# Altium PCB PCB1.PcbDoc
Units mil, origin at the board's own origin, x right, y up, seen from the top; angles counter-clockwise.
Board outline 2885 x 3150 mil, 2 copper layers (Top Layer, Bottom Layer); 31 components, 43 nets, 141 pads, 0 vias.
Unrouted connection lines stored in the file: 1.
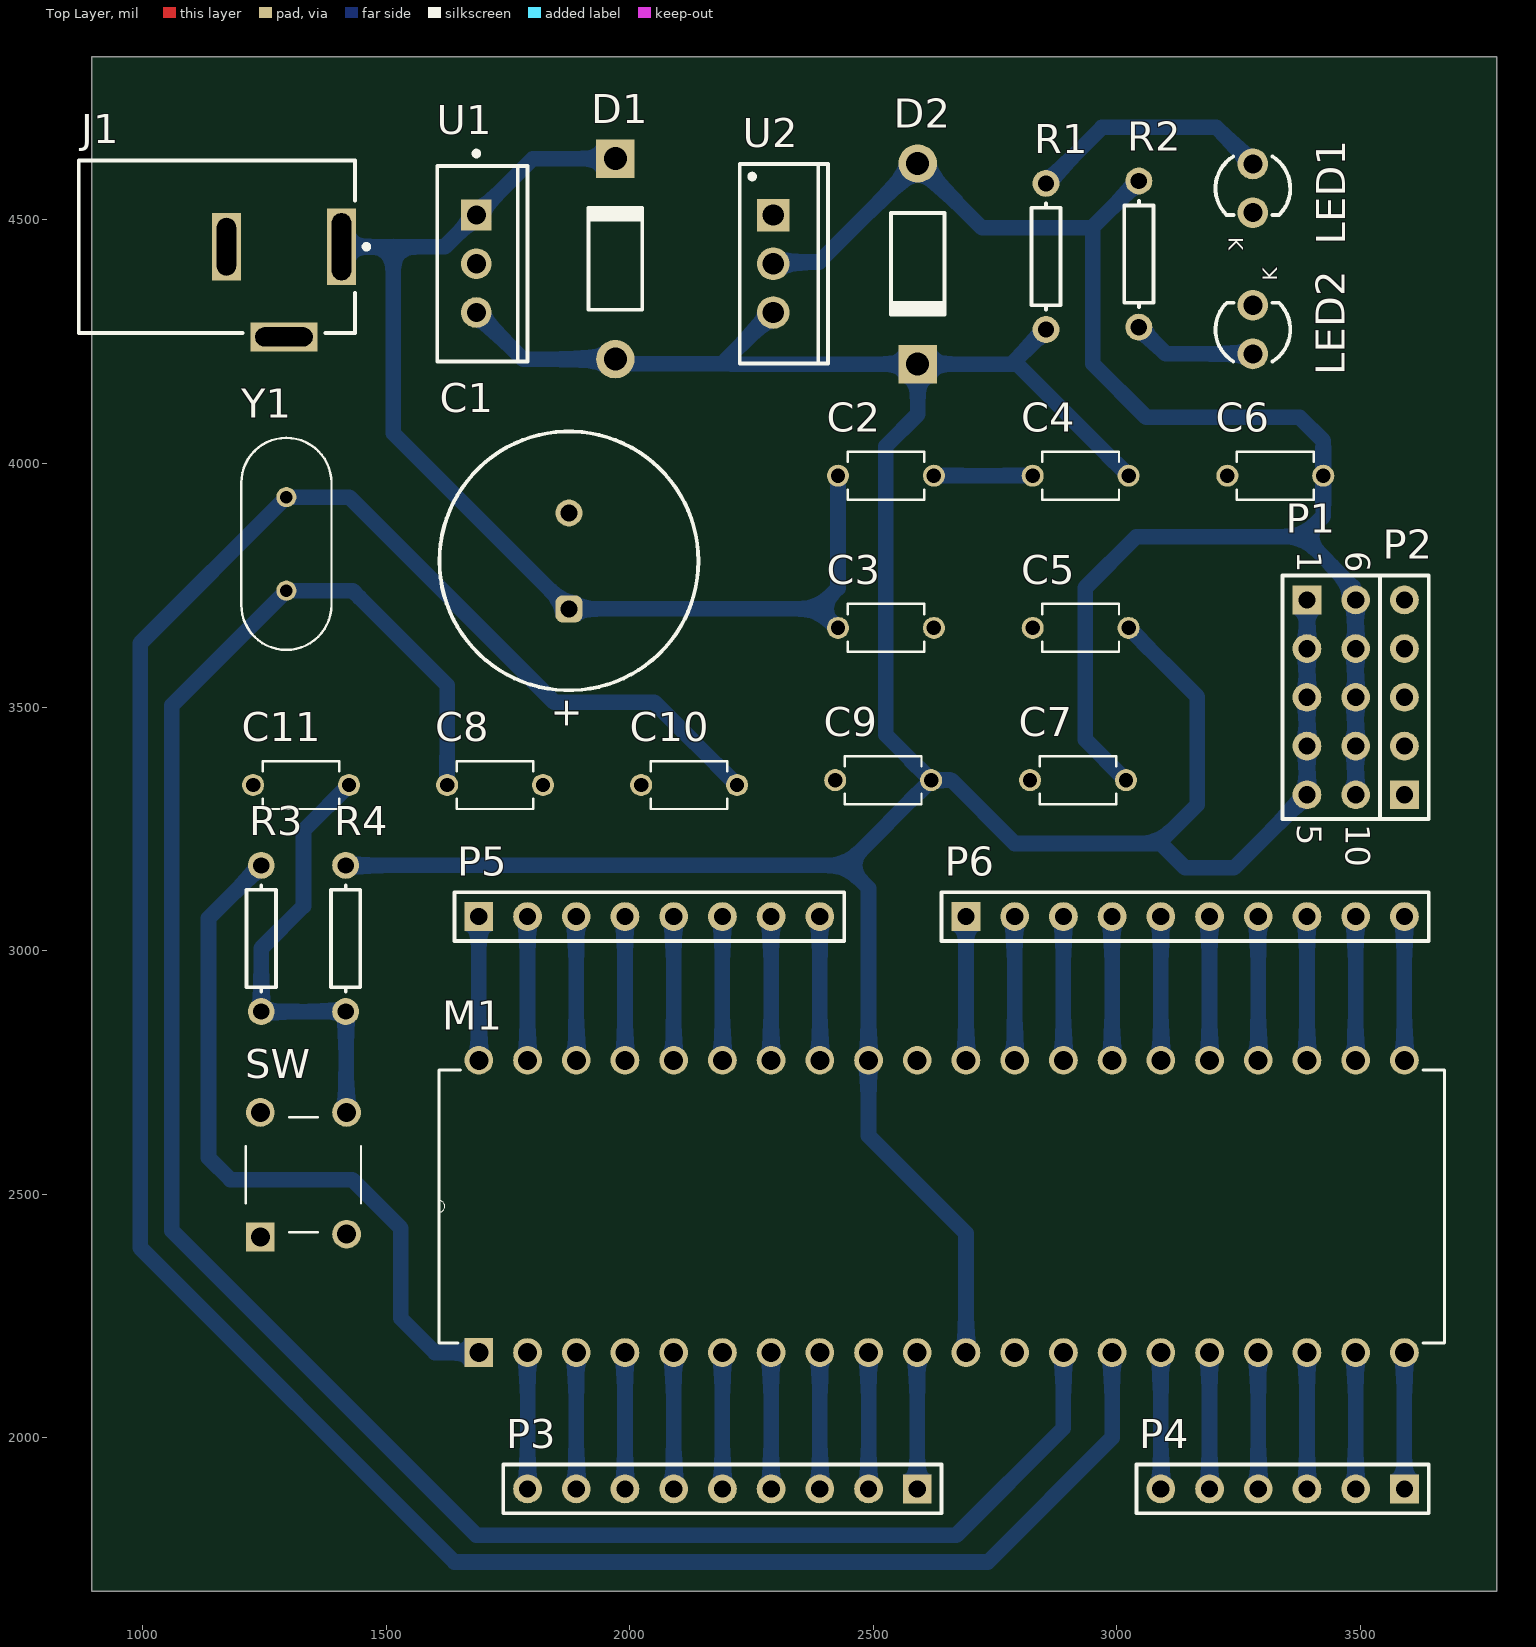
[diagram p0: Top Layer view]
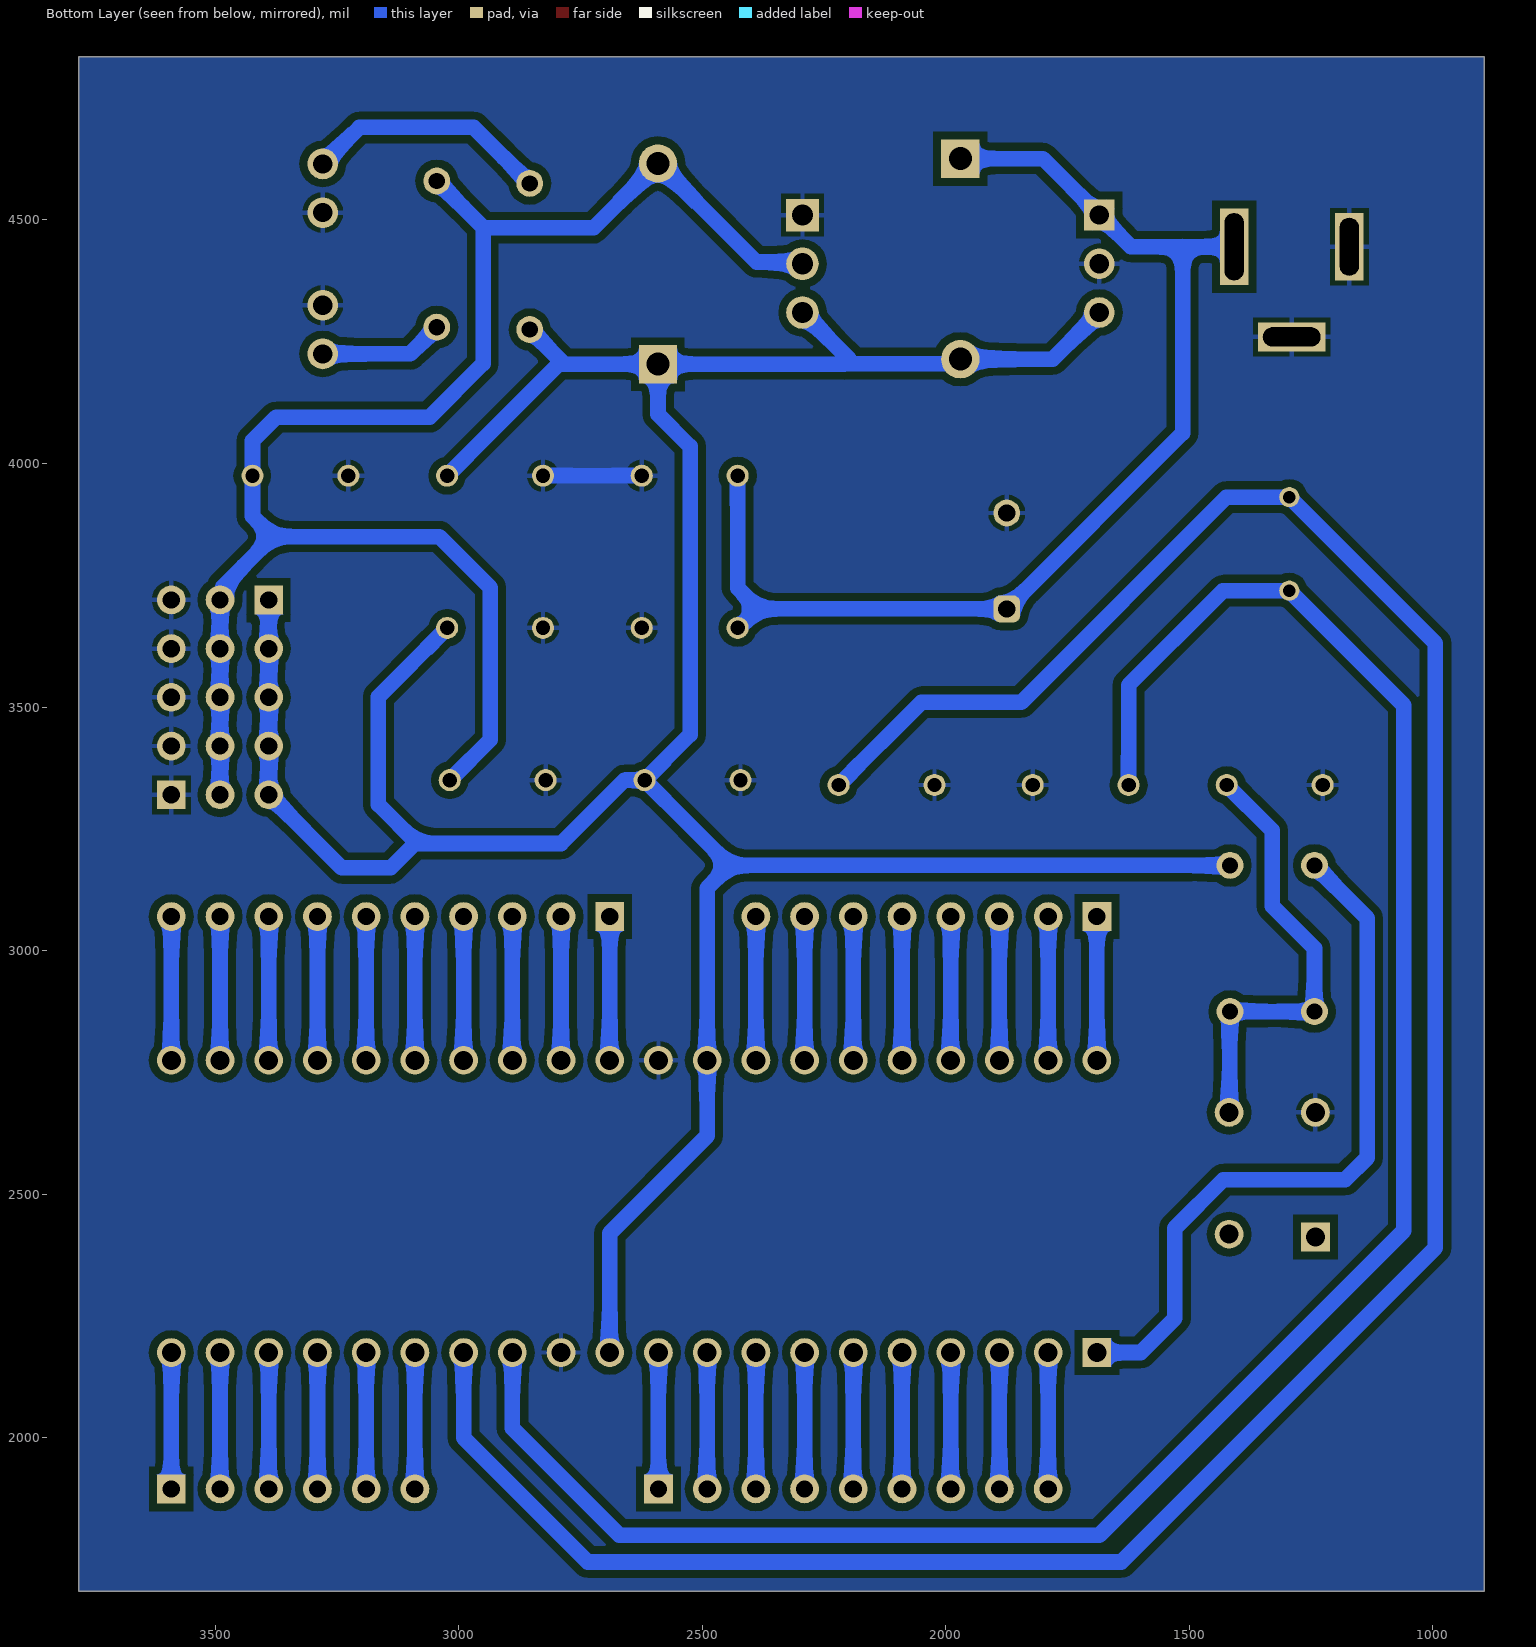
[diagram p1: Bottom Layer view, seen from below]
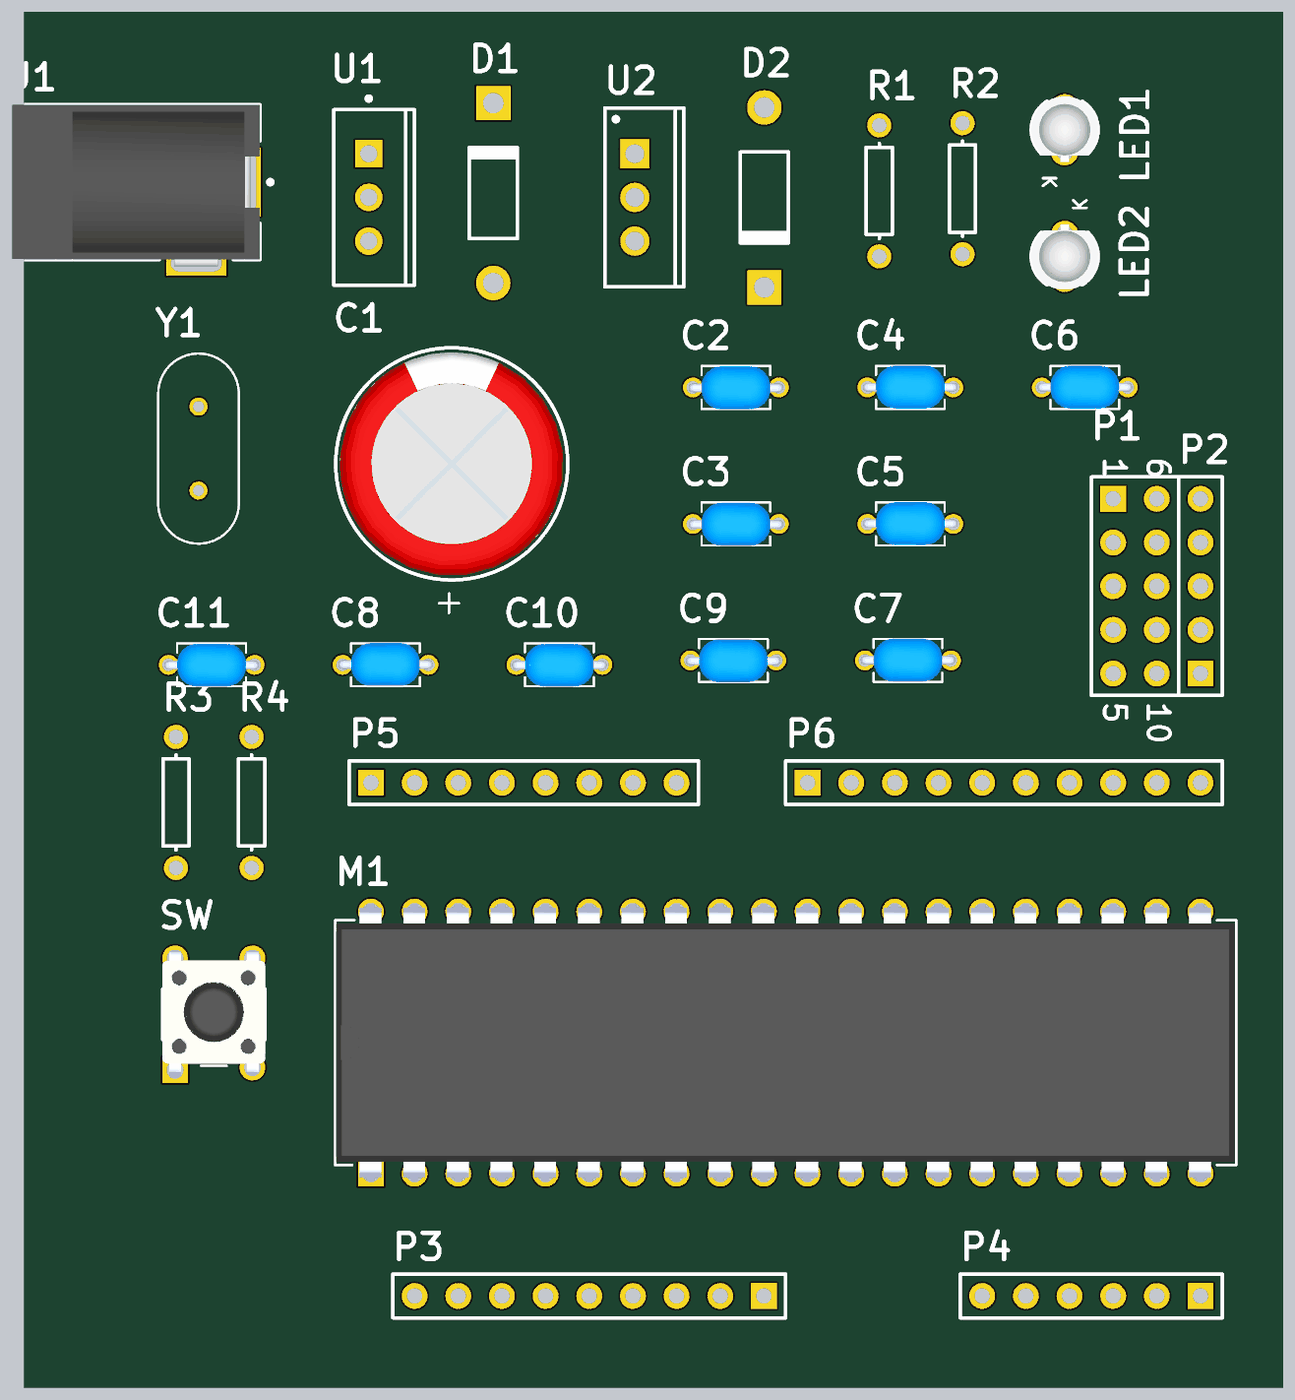
[diagram p2: 3D render of the assembled board from above, using the file's embedded part models]

## Layer stack, top to bottom
Top Solder: solder mask 0.4, Solder Resist, Dk 3.5
Top Layer: signal copper 1.4
Dielectric 1: dielectric 12.6, FR-4, Dk 4.8
Bottom Layer: signal copper 1.4
Bottom Solder: solder mask 0.4, Solder Resist, Dk 3.5

## Board outline
895,1685 3780,1685 3780,4835 895,4835

## Design rules (kind name [scope] priority, off if disabled: settings)
Clearance B_GND [InNamedPolygon('B_GND')] p1: gap=16 ignorepadtopadclearanceinfootprint=FALSE
Clearance [All] p2: gap=16 ignorepadtopadclearanceinfootprint=FALSE
PolygonConnect [All] p1: connectstyle=Relief reliefconductorwidth=10 reliefentries=4 polygonreliefangle="90 Angle" airgapwidth=10
RoutingLayers [All] p1: top layer_v5=FALSE bottom layer_v5=TRUE
RoutingVias [All] p1: holewidth=28 width=50 viastyle="Through Hole" minholewidth=28 minwidth=50 maxholewidth=28 maxwidth=50
SolderMaskExpansion [All] p1: expansion=4 istentingtop=FALSE
UnRoutedNet [All] p1: checkbadconnections=TRUE
Width [All] p1: maxlimit=32 minlimit=32 preferedwidth=32
28 further rules are at their usual default settings.

## Components (designator, comment, footprint, x,y, rotation, side; value= is the part's Value field where it differs from the comment)
C1 "1000uF, 50V" WCAP-ATG8_D13H25 1875,3800 r270 top
C2 "RDE5C2A220J0M1H03A" CAP_RDE5C2A220J0M1H03A 2525.81,3975 r0 top
C3 "RDE5C2A220J0M1H03A" CAP_RDE5C2A220J0M1H03A 2525.81,3662.5 r0 top
C4 "RDE5C2A220J0M1H03A" CAP_RDE5C2A220J0M1H03A 2925.41,3975 r180 top
C5 "RDE5C2A220J0M1H03A" CAP_RDE5C2A220J0M1H03A 2925.41,3662.5 r180 top
C6 "RDE5C2A220J0M1H03A" CAP_RDE5C2A220J0M1H03A 3325,3975 r180 top
C7 "RDE5C2A220J0M1H03A" CAP_RDE5C2A220J0M1H03A 2920,3350 r180 top
C8 "RDE5C2A220J0M1H03A" CAP_RDE5C2A220J0M1H03A 1723.33,3340 r180 top
C9 "RDE5C2A220J0M1H03A" CAP_RDE5C2A220J0M1H03A 2520,3350 r0 top
C10 "RDE5C2A220J0M1H03A" CAP_RDE5C2A220J0M1H03A 2121.67,3340 r0 top
C11 "RDE5C2A220J0M1H03A" CAP_RDE5C2A220J0M1H03A 1325,3340 r0 top
D1 "Diode 1N4004" DO-41 1970.2,4420 r90 top
D2 "Diode 1N4004" DO-41 2591.01,4410 r270 top
J1 "PJ-002A" CUI-PJ-002A_V 1290,4445 r180 top
LED1 "151031SS06000" "Type 3mm" 3278.98,4565 r270 top
LED2 "151031SS06000" "Type 3mm" 3278.98,4275 r90 top
M1 "PIC16F877A-I/P" DIP254P1524X483-40 3590,2775 r90 top
P1 "Header 5X2A" HDR2X5_CEN 3390,3720 r270 top
P2 "Header 5" HDR1X5 3590.03,3320 r90 top
P3 "Header 9" HDR1X9 2590.03,1895 r180 top
P4 "Header 6" HDR1X6 3590.03,1895 r180 top
P5 "Header 8" HDR1X8 1690,3070 r0 top
P6 "Header 10" HDR1X10 2690.03,3070 r0 top
R1 "Res1" AXIAL-0.3 2854.25,4425 r90 top value=330
R2 "Res1" AXIAL-0.3 3045,4430 r270 top value=330
R3 "Res1" AXIAL-0.3 1243.35,3025 r90 top value=470
R4 "Res1" AXIAL-0.3 1416.65,3025 r270 top value=10K
SW "3-1825910-1" TE_3-1825910-1 1330,2540 r90 top
U1 "LM7805CT" FAIR-TO-220-3 1685,4410 r0 top
U2 "LD1117V33" TO220 2294.39,4410 r270 top
Y1 "LFXTAL003240BULK" HC49P488W45L1105T470H410 1295,3835 r270 top

## Footprints (in the part's own frame and the unit in brackets; to place one, negate y for a bottom-side part, rotate by r counter-clockwise, add the part's x,y. Pads: shape width x height; smd on the part's side, far side on the other; paste and mask are expansions set on the pad)
AXIAL-0.3 [mm] "Axial Device, Thru-Hole; 2 Leads; 0.3 in Pin Spacing"
  round 1.4 hole 0.85: 1(-3.81,0) 2(3.81,0)
  silkscreen extent -2.77,-0.76 2.77,0.76
CAP_RDE5C2A220J0M1H03A [mm]
  round 1.15 hole 0.75: 1(-2.5,0) 2(2.5,0)
  silkscreen extent -2,-1.25 2,1.25, body extent -2.75,-1.27 2.75,1.23, height 6
CUI-PJ-002A_V [mm] "THD, 3-Leads, Body 14.4x9mm, Height 11mm"
  rect 1.5x4 hole 1 slot 3.5 at 90 deg: 1(-3,0)
  rect 1.5x3.5 hole 1 slot 3 at 90 deg: 2(3,0)
  rect 3.5x1.5 hole 1 slot 3 at 0 deg: 3(0,4.7)
  silkscreen extent -4.43,-4.5 10.7,4.5, body extent -3.7,-4.5 10.7,4.9, height 11
DIP254P1524X483-40 [mil]
  rect 59x59 hole 39: 1(-600,1900)
  round 59 hole 39: 2(-600,1800) 3(-600,1700) 4(-600,1600) 5(-600,1500) 6(-600,1400) 7(-600,1300) 8(-600,1200) 9(-600,1100) 10(-600,1000) 11(-600,900) 12(-600,800) 13(-600,700) 14(-600,600) 15(-600,500) 16(-600,400) 17(-600,300) 18(-600,200) 19(-600,100) 20(-600,0) 21(0,0) 22(0,100) 23(0,200) 24(0,300) 25(0,400) 26(0,500) 27(0,600) 28(0,700) 29(0,800) 30(0,900) 31(0,1000) 32(0,1100) 33(0,1200) 34(0,1300) 35(0,1400) 36(0,1500) 37(0,1600) 38(0,1700) 39(0,1800) 40(0,1900)
  silkscreen extent -580,-82 -20,1982, body extent -625,-78 25,1980, height 160
DO-41 [mm] "Diode, Axial; Body 5.2 x 2.7 mm (LxDia. max), Lead Dia. 0.86 mm (max)"
  round 2 hole 1.2: 1(-5.23,0)
  rect 2x2 hole 1.2: 2(5.23,0)
  silkscreen extent -2.65,-1.4 2.75,1.4
FAIR-TO-220-3 [mm] "FM, 3-Leads, Body 10.2x4.7mm, Pitch 2.54mm"
  rect 1.6x1.6 hole 1: 1(0,2.54)
  round 1.6 hole 1: 2(0,0) 3(0,-2.54)
  silkscreen extent -2.04,-5.1 2.66,5.87, body extent -2.04,-5.1 2.66,5.1, height 18.95
HC49P488W45L1105T470H410 [mm]
  round 1.05 hole 0.65: 1(-2.44,0) 2(2.44,0)
  silkscreen extent -5.53,-2.35 5.53,2.35, body extent -5.53,-2.41 5.53,2.29, height 4.11
HDR1X5 [mm] "Connector; Header; 5 Position"
  rect 1.5x1.5 hole 0.9: 1(0,0)
  round 1.5 hole 0.9: 2(2.54,0) 3(5.08,0) 4(7.62,0) 5(10.16,0)
  silkscreen extent -1.27,-1.27 11.43,1.27
HDR1X6 [mm] "Connector; Header; 6 Position"
  rect 1.5x1.5 hole 0.9: 1(0,0)
  round 1.5 hole 0.9: 2(2.54,0) 3(5.08,0) 4(7.62,0) 5(10.16,0) 6(12.7,0)
  silkscreen extent -1.27,-1.27 13.97,1.27
HDR1X8 [mm] "Connector; Header; 8 Position"
  rect 1.5x1.5 hole 0.9: 1(0,0)
  round 1.5 hole 0.9: 2(2.54,0) 3(5.08,0) 4(7.62,0) 5(10.16,0) 6(12.7,0) 7(15.24,0) 8(17.78,0)
  silkscreen extent -1.27,-1.27 19.05,1.27
HDR1X9 [mm] "Connector; Header; 9 Position"
  rect 1.5x1.5 hole 0.9: 1(0,0)
  round 1.5 hole 0.9: 2(2.54,0) 3(5.08,0) 4(7.62,0) 5(10.16,0) 6(12.7,0) 7(15.24,0) 8(17.78,0) 9(20.32,0)
  silkscreen extent -1.27,-1.27 21.59,1.27
HDR1X10 [mm] "Connector; Header; 10 Position"
  rect 1.5x1.5 hole 0.9: 1(0,0)
  round 1.5 hole 0.9: 2(2.54,0) 3(5.08,0) 4(7.62,0) 5(10.16,0) 6(12.7,0) 7(15.24,0) 8(17.78,0) 9(20.32,0) 10(22.86,0)
  silkscreen extent -1.27,-1.27 24.13,1.27
HDR2X5_CEN [mm] "Connector; Header; 5x2 Position"
  rect 1.5x1.5 hole 0.9: 1(0,0)
  round 1.5 hole 0.9: 2(2.54,0) 3(5.08,0) 4(7.62,0) 5(10.16,0) 6(0,2.54) 7(2.54,2.54) 8(5.08,2.54) 9(7.62,2.54) 10(10.16,2.54)
  silkscreen extent -1.27,-1.27 11.43,3.81
TE_3-1825910-1 [mm]
  rect 1.498x1.498 hole 0.99: 1(-3.25,2.25)
  round 1.498 hole 0.99: 2(3.25,2.25) 3(-3.1,-2.25) 4(3.25,-2.25)
  silkscreen extent -3,-3 3,3, body extent -3.77,-3 4.02,3, height 17.01
TO220 [mm] "TO, Thru-Hole, Vertical, Heatsink Mounted; 3 In-Line Leads; Pitch 2.54 mm"
  rect 1.7x1.7 hole 1.1: 1(-2.54,0)
  round 1.7 hole 1.1: 2(0,0) 3(2.54,0)
  silkscreen extent -5.2,-1.75 5.2,2.85, body extent -5.25,-1.8 5.25,2.9, height 19.7
"Type 3mm" [mm] "THT, LED-3mm, 2pin- Body 4.15mm(max)"
  round 1.6 hole 1: 1(1.27,0) 2(-1.27,0)
  silkscreen extent -1.66,-1.95 1.4,1.95, body extent -1.93,-1.94 1.87,1.94, height 10.5
WCAP-ATG8_D13H25 [mm] "Aluminum Electrolytic Capacitors, 13x25mm"
  rrect50% 1.4x1.4 hole 0.9: 1(2.5,0)
  round 1.4 hole 0.9: 2(-2.5,0)
  silkscreen extent -6.75,-6.75 6.75,6.75, body extent -6.49,-6.5 6.5,6.5, height 25.31

## Part data
C1: library part 860010678024, "WCAP-ATG8 Aluminum Electrolytic Capacitor, Radial, THT, D13xH25, 1000uF, 50V", Capacitance=1000uF, Capacitance Tolerance=+/-20%, Leakage Current=500uA, Manufacturer="Wurth Elektronik", Operating Temperature="-40 to +85degC", Rated Voltage=50VDC, Ripple Current=1485mA, ComponentLink1Description=Manufacturer, ComponentLink1URL=http://www.we-online.de, ComponentLink2Description=Datasheet, ComponentLink2URL=https://www.we-online.com/catalog/datasheet/860010678024.pdf, Diameter=13mm, Dissipation Factor=10%, Endurance=2000h, Height=25mm, Manufacturer Part Number=860010678024, Mounting Technology=THT, Packaging="Ammo Pack", Published Date="October 2020", Technical Reference=ATBI250102M050DSPACB000
C2 C3 C4 C5 C6 C7 C8 C9 C10 C11: "Lead Capacitor C0G_EIA_ with Capacitance: 22pF and Rated Voltage: 100Vdc", Package="Radial Murata", Availability=Unavailable, MF=Murata, MP=RDE5C2A220J0M1H03A, Price=None, SnapEDA_Link=https://www.snapeda.com/parts/RDE5C2A220J0M1H03A/Murata/view-part/4545539/?ref=snap
D1 D2: "1 Amp General Purpose Rectifier", Code_JEDEC=DO-204-AL, ComponentLink1Description="Manufacturer Link", ComponentLink1URL=http://www.fairchildsemi.com/, ComponentLink2Description=Datasheet, ComponentLink2URL=http://www.fairchildsemi.com/ds/1N%2F1N4001.pdf, DatasheetVersion=1998, LatestRevisionDate=17-Jul-2002, LatestRevisionNote="Re-released for DXP Platform.", PackageDescription="Diode, Axial; Body 5.2 x 2.7 mm (LxDia. max), Lead Dia. 0.86 mm (max)", PackageReference=DO-41, PackageVersion=Aug-1999, Published=8-Jun-2000, Publisher="Altium Limited"
J1: library part CMP-2000-06895-1, "Through Hole Right Angle DC Power Jack, 2.5 A, 2 mm Center Pin, 3 Position, -25 to 85 degC, RoHS, Bulk", Current Rating=2.5A, Flammability Rating=UL94V-0, Insulation Resistance=50MOhms, Manufacturer=CUIInc., Operating Temperature Range=-25Cto+85C, Package Description="3-Pin Through Hole Device, Body 14.4 x 9 mm, Height 11 mm", Voltage Rating=24V, Brand=CUI, Connector Type=DCPowerJack, Contact Gender=Male, Contact Material=Copper, Contact Plating=Nickel, Datasheet URL=http://www.cui.com/product/resource/pj-002a.pdf, Datasheet Version="Rev. 1.03, 04/2016", Factory Pack Quantity=500, Housing Material=PolybutyleneTerephthalate(PBT), Inside Contact Diameter=2mm, Manufacturer URL=http://www.cui.com/, Mounting Angle=Right, Mounting Style=ThroughHole, Mounting Technology=ThroughHole, Outside Contact Diameter=6.5mm, Package Reference=PJ-002A, Product=Jacks, Product Category=DCPowerConnectors, RoHS=True, Termination Style=ThroughHole
LED1 LED2: library part CMP-1488-00002-1, "THT LED round mono-color color lens, WL-TMRW, Super Red", Emitting color="Super Red", Manufacturer="Wuerth Elektronik", ComponentLink1Description="Manufacturer URL", ComponentLink1URL=http://www.we-online.com, ComponentLink2Description=Datasheet, ComponentLink2URL=http://katalog.we-online.de/pbs/datasheet/7448042001.pdfhttp://katalog.we-online.de/pbs/datasheet/7448042001.pdfhttp://katalog.we-online.de/pbs/datasheet/7448042001.pdfhttp://katalog.we-online.de/pbs/datasheet/151031SS06000.pdf, PackageReference="Type 3mm", PartNumber=151031SS06000
M1: "PIC PICÂ® 16F Microcontroller IC 8-Bit 20MHz 14KB _8K x 14_ FLASH 40-PDIP", Package="DIP-40 Microchip", Availability=Unavailable, MF=Microchip, MP=PIC16F877A-I/P, Price=None, SnapEDA_Link=https://www.snapeda.com/parts/PIC16F877A-I/P/Microchip/view-part/1877145/?ref=snap
P1: "Header, 5-Pin, Dual row", LatestRevisionDate=17-Jul-2002, LatestRevisionNote="Re-released for DXP Platform.", Publisher="Altium Limited"
P2: "Header, 5-Pin", LatestRevisionDate=17-Jul-2002, LatestRevisionNote="Re-released for DXP Platform.", Publisher="Altium Limited"
P3: "Header, 9-Pin", LatestRevisionDate=17-Jul-2002, LatestRevisionNote="Re-released for DXP Platform.", Publisher="Altium Limited"
P4: "Header, 6-Pin", LatestRevisionDate=17-Jul-2002, LatestRevisionNote="Re-released for DXP Platform.", Publisher="Altium Limited"
P5: "Header, 8-Pin", LatestRevisionDate=17-Jul-2002, LatestRevisionNote="Re-released for DXP Platform.", Publisher="Altium Limited"
P6: "Header, 10-Pin", LatestRevisionDate=17-Jul-2002, LatestRevisionNote="Re-released for DXP Platform.", Publisher="Altium Limited"
R1 R2 R3 R4: "Resistor", LatestRevisionDate=17-Jul-2002, LatestRevisionNote="Re-released for DXP Platform.", PackageDescription="Axial Device, Thru-Hole; 2 Leads; 0.3 in Pin Spacing", PackageReference=AXIAL-0.3, Published=8-Jun-2000, Publisher="Altium Limited"
SW: "Switch Push Button OFF _ON_ SPST Round Button 0.05A 24VDC Momentary Contact PC Pins Thru-Hole", Package=None, Availability=Unavailable, EU_RoHS_Compliance=Compliant, MF="TE Connectivity", MP=3-1825910-1, Price=None, SnapEDA_Link=https://www.snapeda.com/parts/3-1825910-1/TE%20Connectivity%20ALCOSWITCH%20Switches/view-part/452461/?ref=snap, TE_purchase_URL=https://www.te.com/usa-en/product-3-1825910-1.html?te_bu=Cor&te_type=disp&te_campaign=seda_glo_cor-seda-global-disp-prtnr-fy19-seda-model-bom-cta_sma-317_1&elqCampaignId=32493
U1: library part CMP-2000-04938-1, "Positive Voltage Regulator, 5 V, 1 A, -40 to 125 degC, 3-Pin TO-220, RoHS, Tube", Manufacturer=FairchildSemiconductor, Maximum Input Voltage=35V, Maximum Output Current=2.2(Typ)A, Maximum Quiescent Current=8mA, Operating Temperature=-40to125degC, Output Voltage=5V, Package=3TO-220AB, Package Description="3-Pin Through Hole Device, Body 10 x 4.5 mm, Pitch 2.54 mm", Package Reference=TO-220, Typical Dropout Voltage @ Current=2@1AV, Accuracy=±4%, Category=LinearRegulator, Datasheet URL=https://datasheet.ciiva.com/26904/lm7805ct-26904988.pdf, Datasheet Version=Aug-12, Line Regulation=100mV, Load Regulation=100mV, Manufacturer URL=https://www.fairchildsemi.com/, Mounting=ThroughHole, Number of Outputs=1, Output Type=Fixed, Package URL=https://www.fairchildsemi.com/package-drawings/TO/TO220B03.pdf, Packaging=Rail/Tube, Polarity=Positive, Rad Hard=No, Type=Linear
U2: library part CMP-0244-00470-1, "Fixed Low Drop Positive Voltage Regulator, 3.3V, 3-Pin TO-220", ComponentLink1Description="Manufacturer URL", ComponentLink1URL=http://www.st.com, ComponentLink2Description=Datasheet, ComponentLink2URL=http://www.st.com/internet/com/TECHNICAL_RESOURCES/TECHNICAL_LITERATURE/DATASHEET/CD00000544.pdf, ComponentLink3Description="Package Specification", ComponentLink3URL=http://www.st.com/internet/com/TECHNICAL_RESOURCES/TECHNICAL_LITERATURE/PACKAGE_INFORMATION/CD00004649.pdf, DatasheetVersion=1/11/2011, PackageDescription="TO, Thru-Hole, Vertical, Heatsink Mounted; 3 In-Line Leads; Pitch 2.54 mm", PackageReference=TO220, PackageVersion=ver3.0
Y1: "16MHz Â±30ppm Crystal 30pF 40 Ohms HC-49/US", Package="HC-49/US IQD Frequency Products", Availability=Unavailable, MF="IQD Frequency Products", MP=LFXTAL003240BULK, Price=None, SnapEDA_Link=https://www.snapeda.com/parts/LFXTAL003240BULK/IQD%20Frequency%20Products/view-part/2463585/?ref=snap

## Nets (pads, with @x,y where several pads share a name; then routed paths per layer and width w, separated by ;. In a path a pad name is that pad's centre, name@x,y a point inside that pad or via, vN(x,y) a via of type N, cw(c..) or ccw(c..) an arc to the next point about the centre after c; other vN are vias at no path point)
1: M1.1 R3.2 | length 1473.9
  Bottom Layer w32: R3.2 1135,3066.65 1135,2575 1180,2530 1430,2530 1530,2430 1530,2245 1600,2175 M1.1
2: M1.2 P3.9 | length 280
  Bottom Layer w32: P3.9 M1.2
3: M1.3 P3.8 | length 280
  Bottom Layer w32: P3.8 M1.3
3v3: C6.1 C7.1 D2.1 P1.6 P1.7 P1.8 P1.9 P1.10 R2.1 U2.2 | length 3457.5
  Bottom Layer w32: U2.2 2297.78,4413.4 2388.5,4413.4 D2.1 2723.17,4483.75 2950,4483.75 ; C7.1 2935,3433.43 2935,3745 3040,3850 3381.57,3850 ; R2.1 2950,4485 2950,4483.75 ; P1.10 P1.9 P1.8 P1.7 P1.6 3484.82,3725.18 3484.82,3746.75 3381.57,3850 ; 2950,4483.75 2950,4205 3060,4095 3375,4095 3423.43,4046.57 C6.1 3423.43,3891.85 3381.57,3850
4: M1.4 P3.7 | length 280
  Bottom Layer w32: P3.7 M1.4
5: M1.5 P3.6 | length 280
  Bottom Layer w32: P3.6 M1.5
6: M1.6 P3.5 | length 280
  Bottom Layer w32: P3.5 M1.6
7: M1.7 P3.4 | length 280
  Bottom Layer w32: P3.4 M1.7
8: M1.8 P3.3 | length 280
  Bottom Layer w32: P3.3 M1.8
9: M1.9 P3.2 | length 280
  Bottom Layer w32: P3.2 M1.9
10: M1.10 P3.1 | length 280
  Bottom Layer w32: P3.1 M1.10
13: C8.2 M1.13 Y1.2 | length 4361.6
  Bottom Layer w32: C8.2 1624.91,3545.09 1444.97,3725.03 1431.06,3738.94 Y1.2 1060,3503.94 1060,2425 1685,1800 2670,1800 2890,2020 M1.13
14: C10.2 M1.14 Y1.1 | length 5378
  Bottom Layer w32: C10.2 2050.09,3510 1845,3510 1423.94,3931.06 Y1.1 995,3631.06 995,2390 1640,1745 2735,1745 2990,2000 M1.14
15: M1.15 P4.6 | length 280
  Bottom Layer w32: P4.6 M1.15
16: M1.16 P4.5 | length 280
  Bottom Layer w32: P4.5 M1.16
17: M1.17 P4.4 | length 280
  Bottom Layer w32: P4.4 M1.17
18: M1.18 P4.3 | length 280
  Bottom Layer w32: P4.3 M1.18
19: M1.19 P4.2 | length 280
  Bottom Layer w32: P4.2 M1.19
20: M1.20 P4.1 | length 280
  Bottom Layer w32: P4.1 M1.20
21: M1.21 P6.10 | length 295
  Bottom Layer w32: M1.21 P6.10
22: M1.22 P6.9 | length 295
  Bottom Layer w32: M1.22 P6.9
23: M1.23 P6.8 | length 295
  Bottom Layer w32: M1.23 P6.8
24: M1.24 P6.7 | length 295
  Bottom Layer w32: M1.24 P6.7
25: M1.25 P6.6 | length 295
  Bottom Layer w32: M1.25 P6.6
26: M1.26 P6.5 | length 295
  Bottom Layer w32: M1.26 P6.5
27: M1.27 P6.4 | length 295
  Bottom Layer w32: M1.27 P6.4
28: M1.28 P6.3 | length 295
  Bottom Layer w32: M1.28 P6.3
29: M1.29 P6.2 | length 295
  Bottom Layer w32: M1.29 P6.2
30: M1.30 P6.1 | length 295
  Bottom Layer w32: M1.30 P6.1
33: M1.33 P5.8 | length 295
  Bottom Layer w32: M1.33 P5.8
34: M1.34 P5.7 | length 295
  Bottom Layer w32: M1.34 P5.7
35: M1.35 P5.6 | length 295
  Bottom Layer w32: M1.35 P5.6
36: M1.36 P5.5 | length 295
  Bottom Layer w32: M1.36 P5.5
37: M1.37 P5.4 | length 295
  Bottom Layer w32: M1.37 P5.4
38: M1.38 P5.3 | length 295
  Bottom Layer w32: M1.38 P5.3
39: M1.39 P5.2 | length 295
  Bottom Layer w32: M1.39 P5.2
40: M1.40 P5.1 | length 295
  Bottom Layer w32: M1.40 P5.1
GND: C1.2 C2.2 C3.2 C4.2 C5.2 C6.2 C7.2 C8.1 C9.1 C10.1 C11.1 J1.2 J1.3 LED1.1 LED2.1 M1.12 M1.31 P2.1 P2.2 P2.3 P2.4 P2.5 SW.2 U1.2 U2.1 | length 202.7
  Bottom Layer w32: C2.2 C4.2
NetC1_1: C1.1 C2.1 C3.1 D1.2 J1.1 U1.1 | length 2389.6
  Bottom Layer w32: J1.1 1514.06,4445 ; D1.2 1800.91,4625.91 U1.1 1620,4445 1514.06,4445 ; C3.1 2423.79,3662.5 2384.72,3701.57 ; C2.1 2427.39,3744.24 2384.72,3701.57 ; 1514.06,4445 1514.06,4062.52 C1.1 2384.72,3701.57
NetC11_2: C11.2 R3.1 R4.2 SW.4 | length 920.7
  Bottom Layer w32: SW.4 1417.62,2668.92 1417.62,2874.04 R4.2 R3.1 1243.35,3004.8 1330,3091.45 1330,3246.57 C11.2
NetLED1_2: LED1.2 R1.2 | length 503.4
  Bottom Layer w32: R1.2 2969.25,4690 3203.98,4690 LED1.2
NetLED2_2: LED2.2 R2.2 | length 256.8
  Bottom Layer w32: R2.2 3100,4225 LED2.2
VCC: C4.1 C5.1 C9.2 D1.1 D2.2 M1.11 M1.32 P1.1 P1.2 P1.3 P1.4 P1.5 R1.1 R4.1 U1.3 U2.3 | length 6865.3
  Bottom Layer w32: R4.1 2443.43,3175 ; U1.3 1780.91,4214.09 D1.1 1979.15,4205.15 2012.17,4205.15 2012.32,4205 2207.57,4205 ; U2.3 2198.48,4214.09 2208.48,4204.09 D2.2 ; M1.11 2690,2420 2490,2620 M1.32 2490,3128.43 2443.43,3175 ; R1.1 2783.35,4204.09 ; C5.1 3165,3521.33 3165,3300 3085,3220 ; C4.1 2794.74,4204.09 2783.35,4204.09 ; P1.1 P1.2 P1.3 P1.4 P1.5 3240,3170 3140,3170 3090,3220 3085,3220 ; 2443.43,3175 C9.2 ; D2.2 2591.01,4101.01 2525,4035 2525,3443.43 C9.2 ; D2.2 2783.35,4204.09 ; C9.2 2660,3350 2790,3220 3085,3220
pads on no net: SW.1 SW.3

## Polygon pours and split planes (outlines as drawn)
GND on Bottom Layer "B_GND" (solid, remove dead copper, pour order 6): 895,1685 3780,1685 3780,4835 895,4835

## Text inside footprints (layer, text, board x,y; h text height)
C1: Top Overlay "+" at 1845.98,3521.46 h59.06 r270
LED1: Top Overlay "K" at 3228.98,4465 h30 r270; Mechanical 15 "K" at 3228.98,4465 h30 r270
LED2: Top Overlay "K" at 3328.98,4375 h30 r90; Mechanical 15 "K" at 3328.98,4375 h30 r90
P1: Top Overlay "1" at 3370,3820 h50 r270; Top Overlay "5" at 3370,3260 h50 r270; Top Overlay "10" at 3470,3260 h50 r270; Top Overlay "6" at 3470,3820 h50 r270